# Altium PCB ST-Link.PcbDoc
Units mil, origin at the board's own origin, x right, y up, seen from the top; angles counter-clockwise.
Board outline 1030 x 460 mil, 2 copper layers (Top1, Bottom2), stack 12.8 mil thick; 27 components, 32 nets, 130 pads, 49 vias.
Unrouted connection lines stored in the file: 22.
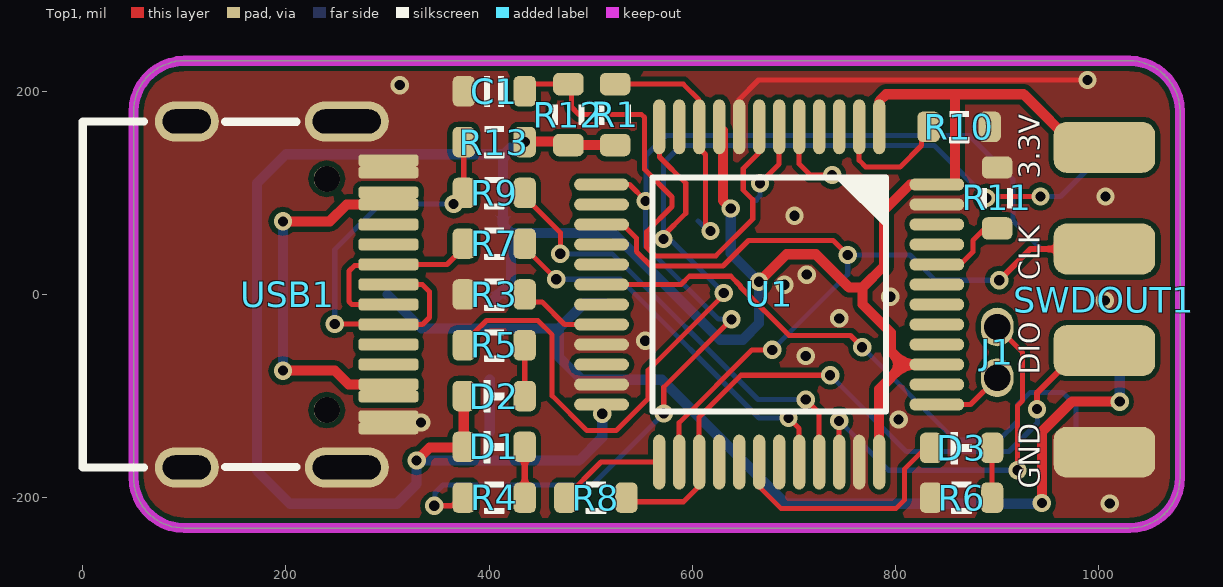
[diagram p0: Top1 view]
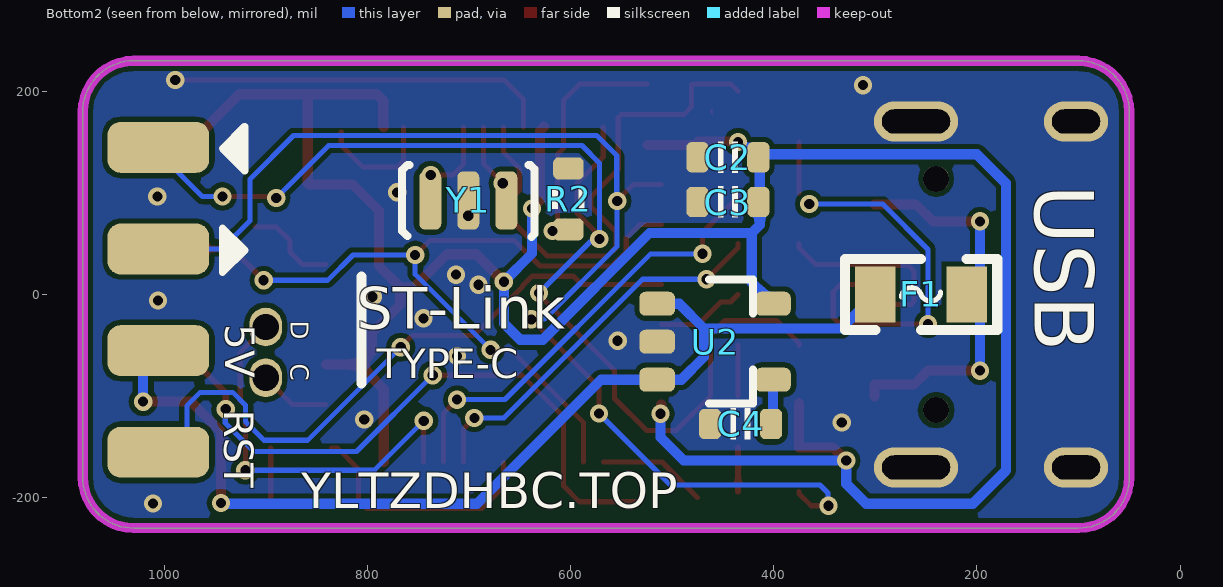
[diagram p1: Bottom2 view, seen from below]
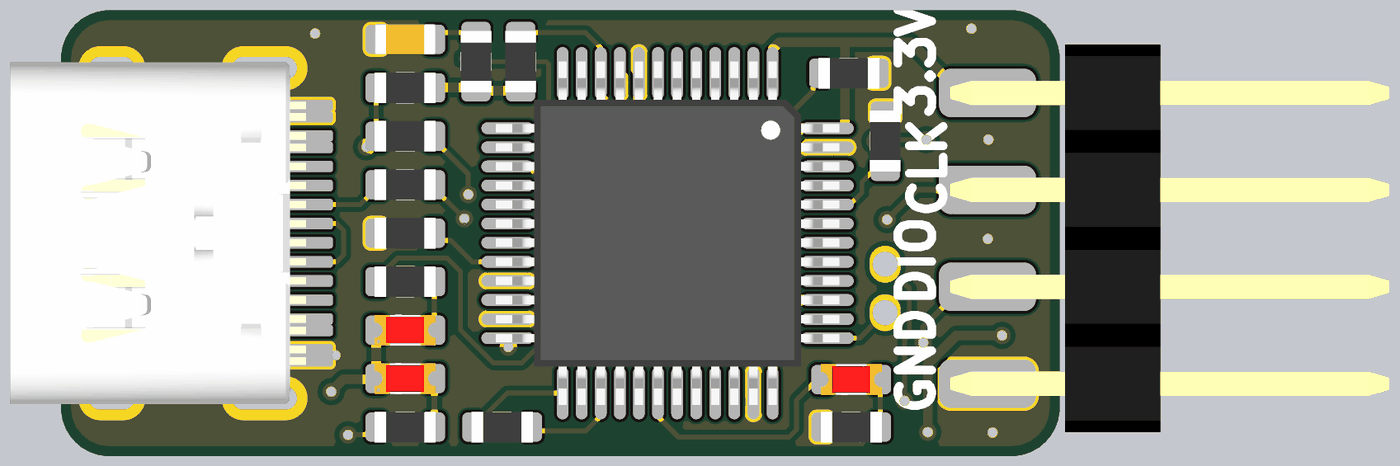
[diagram p2: 3D render of the assembled board from above, using the file's embedded part models]
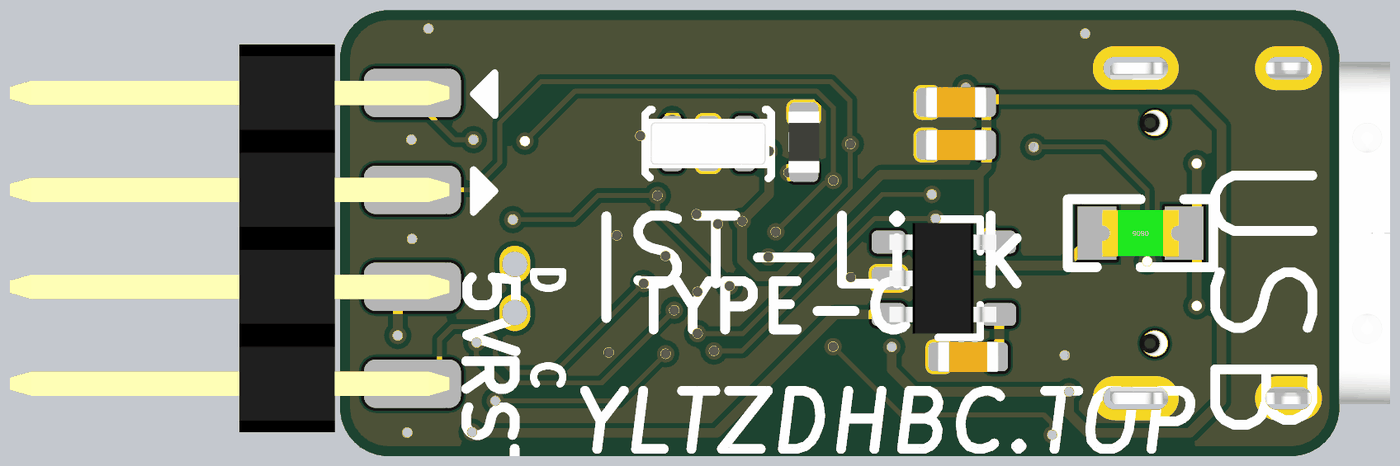
[diagram p3: 3D render of the assembled board from below, using the file's embedded part models]

## Layer stack, top to bottom
Top Solder: solder mask 0.4, Solder Resist, Dk 3.5
Top1: signal copper 1.4
Dielectric 1: core 10, FR-4, Dk 4.2
Bottom2: signal copper 1.4
Bottom Solder: solder mask 0.4, Solder Resist, Dk 3.5

## Board outline
50,-180 50,180 cw(c100,180) 100,230 1030,230 cw(c1030,180) 1080,180 1080,-180 cw(c1030,-180) 1030,-230 100,-230 cw(c100,-180)

## Design rules (kind name [scope] priority, off if disabled: settings)
Clearance [All] p1: gap=5 ignorepadtopadclearanceinfootprint=FALSE
ComponentClearance [All] p1: gap=0 collisioncheckmode=3 verticalgap=0 showdistances=FALSE
DiffPairsRouting [All] p1: maxlimit=9 minlimit=9 mostfreqgap=9 toplayer_minwidth=5 toplayer_maxwidth=100 toplayer_prefwidth=5 bottomlayer_minwidth=5 bottomlayer_maxwidth=100 bottomlayer_prefwidth=5 maxuncoupledlength=500
FanoutControl Fanout_BGA [All] p1: bgadir=Out bgaviamode=Centered fanoutstyle=Auto fanoutdirection=Alternating viagrid=1 // Fanout_BGA (Default Rule)
HoleSize [All] p1: absolutevalues=TRUE maxlimit=10000 minlimit=8 maxpercent=80.000 minpercent=20.000
MinimumSolderMaskSliver [All] p1 off: minsoldermaskwidth=2
PlaneClearance [All] p1: clearance=8
PlaneConnect [All] p1: planeconnectstyle=Direct reliefexpansion=20 reliefentries=4 reliefconductorwidth=10 reliefairgap=10
PolygonConnect [All] p1: connectstyle=Direct reliefconductorwidth=10 reliefentries=4 polygonreliefangle="90 Angle" airgapwidth=10
RoutingVias [All] p1: holewidth=8 width=16 viastyle="Through Hole" minholewidth=6 minwidth=12 maxholewidth=28 maxwidth=50
SilkToBoardRegionClearance [All] p1 off:
SilkToSilkClearance [All] p1: silktosilkclearance=0
SilkToSolderMaskClearance [IsPad] p1: minsilkscreentomaskgap=0 clearancetoexposedcopper=TRUE
SolderMaskExpansion [All] p1: expansion=3 istentingtop=FALSE
Width [All] p1: maxlimit=10000 minlimit=5 preferedwidth=5
20 further rules are at their usual default settings.

## Classes and differential pairs
differential pair USB: +USB_P -USB_N

## Components (designator, comment, footprint, x,y, rotation, side; value= is the part's Value field where it differs from the comment)
C1 "0.1uF" 0603_CAP 405,200 r0 top value=0.1u
C2 "0.1uF" 0603_CAP 445,135 r180 bottom value=0.1u
C3 "10uF" 0603_CAP 445,91 r180 bottom value=0.1u
C4 "10nF" 0603_CAP 432.57,-127.5 r180 bottom value=0.1u
D1 "LED-0603" 0603_LED_RED 405,-150 r0 top
D2 "LED-0603" 0603_LED_RED 405,-100 r0 top
D3 "LED-0603" 0603_LED_RED 865,-151 r0 top
F1 "6V 0.5A" "FU 0805" 254.92,0 r0 bottom
J1 "下载口2P" 下载口2P-1.27 900,-57 r90 top
R1 "10K" 0603_RES 524,177 r90 top
R2 "10K" 0603_RES 602,94 r90 bottom
R3 "10K" 0603_RES 405,0 r180 top
R4 "680R" 0603_RES 405,-200 r0 top
R5 "680R" 0603_RES 405,-50 r0 top
R6 "2K" 0603_RES 865,-200 r0 top
R7 "22R" 0603_RES 405,50 r0 top
R8 "100R" 0603_RES 505,-200 r0 top
R9 "22R" 0603_RES 405,100 r0 top
R10 "10K" 0603_RES 862.57,165 r180 top
R11 "10K" 0603_RES 900,95 r90 top
R12 "10K" 0603_RES 478,177 r270 top
R13 "1K5" 0603_RES 405,150 r0 top
SWDOUT1 "HDR2x4_2.54" HDR2X4_2.54_180H 1005.57,144.72 r0 top
U1 "STM32F103CBT6" LQFP-48 675.57,0 r270 top
U2 "LP2992 3V3" SOT23-5 455.57,-46.5 r180 bottom
USB1 "Type-C" Type-C-TOP 201.57,0 r180 top
Y1 "8MHz" 晶振-3P 700.57,92.5 r0 bottom

## Footprints (in the part's own frame and the unit in brackets; to place one, negate y for a bottom-side part, rotate by r counter-clockwise, add the part's x,y. Pads: shape width x height; smd on the part's side, far side on the other; paste and mask are expansions set on the pad)
0603_CAP [mil]
  rrect50% 22x30 smd: 1(-30,0) 2(30,0)
  silkscreen extent -10,-15 10,15, body extent -31,-16 32,16, height 31
0603_LED_RED [mil]
  rrect50% 22x30 smd: 1(-30,0) 2(30,0)
  silkscreen extent -10,-16 10,16, body extent -31,-16 32,16, height 24
0603_RES [mil]
  rrect50% 22x30 smd: 1(-30,0) 2(30,0)
  silkscreen extent -10,-16 10,16, body extent -31,-16 31,16, height 18
"FU 0805" [mil] "贴片保险丝"
  rect 40x55 smd: 1(-45,0) 2(45,0)
  silkscreen extent -75,-35 75,35, body extent -39,-24 39,24, height 20
HDR2X4_2.54_180H [mil]
  rrect50% 100x50 smd: 1(0,0) 3(0,-100) 5(0,-200) 7(0,-300)
  rrect50% 100x50 smd far side: 2(0,0) 4(0,-100) 6(0,-200) 8(0,-300)
  body extent -38,-350 415,50, height 100
LQFP-48 [mil]
  oval 54x12 smd: 1(-165,108.27) 2(-165,88.58) 3(-165,68.9) 4(-165,49.21) 5(-165,29.53) 6(-165,9.84) 7(-165,-9.84) 8(-165,-29.53) 9(-165,-49.21) 10(-165,-68.9) 11(-165,-88.58) 12(-165,-108.27) 25(165,-108.27) 26(165,-88.58) 27(165,-68.9) 28(165,-49.21) 29(165,-29.53) 30(165,-9.84) 31(165,9.84) 32(165,29.53) 33(165,49.21) 34(165,68.9) 35(165,88.58) 36(165,108.27)
  oval 12x54 smd: 13(-108.27,-165) 14(-88.58,-165) 15(-68.9,-165) 16(-49.21,-165) 17(-29.53,-165) 18(-9.84,-165) 19(9.84,-165) 20(29.53,-165) 21(49.21,-165) 22(68.9,-165) 23(88.58,-165) 24(108.27,-165) 37(108.27,165) 38(88.58,165) 39(68.9,165) 40(49.21,165) 41(29.53,165) 42(9.84,165) 43(-9.84,165) 44(-29.53,165) 45(-49.21,165) 46(-68.9,165) 47(-88.58,165) 48(-108.27,165)
  silkscreen extent -115,-115 115,115, body extent -177,-177 177,177, height 61
SOT23-5 [mm] "SOT23, 3-Leads, Body 3.1x3.0mm (max), Pitch 0.95mm, IPC Medium Density"
  rrect50% 0.889x0.6 smd: 1(-1.5,0.95) 2(-1.5,0) 3(-1.5,-0.95) 4(1.396,-0.95) 5(1.396,0.95)
  silkscreen extent -0.2,-1.55 0.9,1.55, body extent -1.48,-1.45 1.32,1.45, height 1.2
Type-C-TOP [mm]
  round 0.65 hole 0.65: 0(-0.98,2.89) 0(-0.98,-2.89)
  oval 1.6x1 hole 0.6 slot 1.2 at 0 deg: 1(2.52,4.325) 2(2.52,-4.325)
  oval 2.1x1 hole 0.6 slot 1.7 at 0 deg: 3(-1.48,-4.325) 4(-1.48,4.325)
  rrect50% 1.5x0.3 smd: A1(-2.52,-3.35) A4(-2.52,-2.55) A5(-2.52,-1.25) A6(-2.52,-0.25) A7(-2.52,0.25) A8(-2.52,1.25) A9(-2.52,2.55) A12(-2.52,3.35) B1(-2.52,3.05) B4(-2.52,2.25) B5(-2.52,1.75) B6(-2.52,0.75) B7(-2.52,-0.75) B8(-2.52,-1.75) B9(-2.52,-2.25) B12(-2.52,-3.05)
  silkscreen extent -0.22,-4.33 5.12,4.33, body extent -2.57,-4.48 5.18,4.48, height 3.26
下载口2P-1.27 [mil]
  oval 38x32 hole 26 mask+0: 1(-25,0) 2(25,0)
晶振-3P [mm] "贴片晶振"
  rrect50% 0.55x1.45 smd: 1(-0.95,0) 2(0,0) 3(0.95,0)
  silkscreen extent -1.65,-0.89 1.65,0.91, body extent -1.6,-0.89 1.65,0.89, height 0.7

## Part data
C1 C2 C3 C4: library part 电容-0603, "电容"
D1 D2 D3: library part 二极管-0603-RED, "发光二极管"
F1: library part FU, "贴片保险丝", BOM名称=贴片保险丝, 学习资源=https://shop463601444.taobao.com, 版权归属="封装库来自淘宝卖家 ID：黄晶宝石"
J1: library part 接插件-下载口2P, "下载口2P SWD"
R1 R2 R3 R4 R5 R6 R7 R8 R9 R10 R11 R12 R13: library part 电阻-0603, "电阻"
SWDOUT1: "Header"
U1: "ARM Cortex-M3 32-bit MCU, 128 KB Flash, 20 KB Internal RAM, 37 I/Os, 48-pin LQFP, -40 to 85 degC, Tray", I/Os (High Current)=37, Operating Frequency(F) (Processor speed) (MHz)=72, Supplier Part Number 1=497-6288-ND, Supply Voltage(Vcc) min (V)=2, A/D Converter="2x12-bit (10 Channel)", ComponentLink1Description="Manufacturer URL", ComponentLink1URL=http://www.st.com/web/en/home.html, ComponentLink2Description=Datasheet, ComponentLink2URL=http://www.st.com/st-web-ui/static/active/en/resource/technical/document/datasheet/CD00161566.pdf, ComponentLink3Description="Package Specification", ComponentLink3URL=http://www.st.com/st-web-ui/static/active/en/resource/technical/document/datasheet/DM00058181.pdf, Core="ARM Cortex-M3", DatasheetVersion="Rev. 16", FLASH Size (Prog) (kB)=128, Internal RAM Size (kB)=20, Mounting Technology="Surface Mount", PackageDescription="48-Pin Low Profile Quad Flat Package, 7 x 7 mm Body, 0.5 mm Pitch", PackageReference=LQFP48, PackageVersion="Rev. 6, 06/2013", Packing=Tray, PartNumber=STM32F103CBT6, Supplier 1=Digi-Key, Supplier 2=Farnell, Supplier 3=Newark, Supplier 4=Newark, Supplier 5=Mouser, Supplier Part Number 2=1606327, Supplier Part Number 3=11N8296, Supplier Part Number 4=57P1214, Supplier Part Number 5=511-STM32F103CBT6
U2: library part LP2992, "LDO"
USB1: library part USB-Type-C-TOP
Y1: library part 晶振-3Pin, "村田贴片"

## Via types
v1: diameter 18, hole 10, Top1 to Bottom2, tented both sides, 49 vias

## Nets (pads, with @x,y where several pads share a name; then routed paths per layer and width w, separated by ;. In a path a pad name is that pad's centre, name@x,y a point inside that pad or via, vN(x,y) a via of type N, cw(c..) or ccw(c..) an arc to the next point about the centre after c; other vN are vias at no path point)
3V3: C2.2 C3.2 D1.1 D2.1 R1.1 R12.2 R13.2 SWDOUT1.1 U1.1 U1.9 U1.24 U1.36 U1.39 U1.48 U2.5 | length 2718.4
  Top1 w10: v1(328.57,-163.5) 341.5,-150.57 375,-150.57 D1.1 D2.1@375,-107.14 ; v1(435,150) 435.5,150.5 474.5,150.5 R12.2 R1.1 ; U1.24 510.57,-116.62 v1(511.37,-117.41) ; U1.9 630.05,161.32 630.05,92.43 v1(637.83,84.65) ; v1(665.57,12.5) 692.57,39.5 721.57,39.5 754.06,7.02 767.57,7.02 ; U1.36 783.84,-93.23 808.18,-68.9 ; U1.1 784.23,165.38 784.23,190.52 790.7,197 858.6,197 926,197 978.28,144.72 SWDOUT1.1 ; U1.39 808.18,-68.9 ; 858.6,196.5 858.6,109.19 857.68,108.27 814.14,108.27 788.57,82.71 788.57,28.02 767.57,7.02 ; 767.57,7.02 767.57,-9.86 795.21,-37.5 795.21,-55.93 808.18,-68.9
  Bottom2 w10: U2.5 421.58,11.85 421.58,60.5 ; C2.2@413.65,131.07 413.65,91 413.65,68.43 421.58,60.5 ; v1(435,150) 432.84,150 427.53,144.69 420.96,144.69 415,138.73 C2.2 412,138 200,138 171.43,109.43 171.43,-173.43 204,-206 309,-206 328.57,-186.43 v1(328.57,-163.5) 488.5,-163.5 511.37,-140.63 v1(511.37,-117.41) ; v1(637.83,84.65) 637.83,40.25 v1(665.57,12.5) 665.57,-28.5 649.57,-44.5 627.18,-44.5 522.18,60.5 421.58,60.5
5V: F1.2 SWDOUT1.6 U2.1 U2.3 | length 1016.2
  Top1 w10: v1@944,-206 944,-135.03 973.53,-105.5 v1(1020.57,-105.5)
  Bottom2 w10: F1.2 333.39,-33.46 372.61,-33.46 ; 372.57,-33.5 468.57,-33.5 ; U2.1 492.98,-9.1 468.57,-33.5 ; v1@944,-206 691.99,-206 569.89,-83.9 U2.3 490.98,-83.9 468.57,-61.5 468.57,-33.5 ; SWDOUT1.6@1010.57,-55.28 1020.57,-65.28 v1(1020.57,-105.5)
  other v1: 944,-205.28
5V_IN: F1.1 USB1.A4 USB1.A9 USB1.B4 USB1.B9 | length 378.8
  Top1 w10: v1(197,-75) 248.23,-75 261.81,-88.58 USB1.B4 USB1.A9 ; v1(197,71.93) 243.19,71.93 259.84,88.58 USB1.B9
  Bottom2 w10: v1(197,-75) v1(197,71.93)
GND: C1.1 C2.1 C3.1 C4.1 R2.2 R3.2 R6.1 R10.1 R11.2 SWDOUT1.7 U1.8 U1.21 U1.23 U1.35 U1.47 U2.2 USB1.1 USB1.2 USB1.3 USB1.4 USB1.A1 USB1.A12 USB1.B1 USB1.B12 Y1.2 | length 377.8
  Top1 w5: U1.8 646.05,191.97 665.07,211 v1(989,211)
  other v1: 1010.83,-205.71 333,-126 803,-123 711.57,-60.5 553.57,-45.5 744.57,-23.5 1005.91,-5.91 794.72,-2.2 690.57,9.5 712.57,19.5 700.57,77.5 1006.57,96.5 770.57,100.5 312,206
JTCK: SWDOUT1.3 U1.15 U1.26 | length 848.3
  Top1 w5: U1.15 531.57,68.9 545.07,55.4 545.07,42.16 559.23,28 630.07,28 655.22,53.15 738.6,53.15 v1(752.89,38.86) ; U1.26 586.99,-126.23 658.72,-54.5 v1(678.57,-54.5)
  Top1 w6: v1(902,14) 932.72,44.72 SWDOUT1.3 SWDOUT1.3@1010.57,44.72
  Bottom2 w5: v1(678.57,-54.5) 752.89,19.82 v1(752.89,38.86) 814.14,38.86 839,14 v1(902,14)
JTDI: U1.17
JTDO: U1.16
JTMS: R8.2 SWDOUT1.5 U1.27 | length 652.3
  Top1 w5: R8.2@535,-204 591.26,-204 606.68,-188.58 U1.27 606.68,-120.68 647.86,-79.5 v1(735.57,-79.5)
  Top1 w6: v1(939.29,-112.87) 939.29,-96.56 980.57,-55.28 SWDOUT1.5
  Bottom2 w5: v1(735.57,-79.5) 810.57,-154.5 911.7,-154.5 939.79,-126.41 939.79,-113.37 v1(939.29,-112.87)
LED_RUN: D3.1 U1.30 | length 244.8
  Top1 w5: U1.30 665.73,-189.16 687.07,-210.5 800.57,-210.5 808.57,-202.5 808.57,-172 829.57,-151 D3.1
NetC1_2: C1.2 R12.1 U1.7 | length 518.5
  Top1 w5: C1.2 442,207 R12.1 ; R12.1@479.93,207.17 481,206.11 481,184.5 488.5,177 550.07,177 553,174.07 553,122.98 580,95.98 580,86.63 555.07,61.7 555.07,46.3 563.37,38 623.07,38 659.45,74.37 659.45,93.29 650.07,102.67 650.07,124 665.73,139.66 U1.7
NetC4_2: C4.2 U2.4 | length 51.6
  Bottom2 w10: C4.2@400.63,-135.5 U2.4
NetD1_2: D1.2 R4.2 | length 43.4
  Top1 w6: R4.2@435,-194 D1.2@435,-150.57
NetD2_2: D2.2 R5.2 | length 50
  Top1 w5: D2.2 R5.2
NetD3_2: D3.2 R6.2 | length 49
  Top1 w5: R6.2 D3.2
NetR1_2: R1.2 R2.1 U1.10 | length 238.9
  Top1 w5: R1.2 591,207 606.68,191.32 606.68,143.98 612.86,137.8 612.86,67.39 v1(617.75,62.5)
  Bottom2 w5: R2.1@605.57,72.5 615.57,62.5 v1(617.75,62.5)
NetR3_1: R3.1 U1.20 | length 87.8
  Top1 w5: R3.1 442.5,-7.5 452.12,-7.5 474.15,-29.53 U1.20
NetR7_2: R7.2 U1.32 | length 380.8
  Top1 w5: R7.2 435,46 v1(466,15) ; v1(694.57,-121.5) 705.1,-132.03 U1.32
  Bottom2 w5: v1(466,15) 529.07,15 665.57,-121.5 v1(694.57,-121.5)
NetR8_1: R8.1 U1.25 | length 106.8
  Top1 w5: R8.1 510,-165 U1.25
NetR9_2: R9.2 U1.33 | length 442.5
  Top1 w5: R9.2 435,96 470,61 v1(470,40) ; v1(711.57,-103.5) 724.79,-116.71 U1.33
  Bottom2 w5: v1(470,40) 521.03,40 664.52,-103.5 v1(711.57,-103.5)
NetR10_2: R10.2 U1.2 | length 119.3
  Top1 w5: U1.2 764.16,131.97 770.6,125.52 804.52,125.52 825.57,146.57 R10.2@825.57,160
NetR11_1: R11.1 U1.44 | length 91.3
  Top1 w5: U1.44 863.64,29.53 876,41.89 876,53 889.5,66.5 R11.1@910,66.5
NetU1_5: U1.5 Y1.3 | length 73.7
  Top1 w5: U1.5 705.1,128.29 715.89,117.5 v1(737.57,117.5)
NetU1_6: U1.6 Y1.1 | length 82.2
  Top1 w5: v1(666.57,109.5) 685.42,128.34 U1.6
  Bottom2 w5: Y1.1 662.57,93.1 666.57,97.1 v1(666.57,109.5)
nRST: SWDOUT1.8 U1.18 | length 637.9
  Top1 w5: U1.18 588.92,9.84 596.97,17.89 637.74,17.89 647.41,8.23 647.41,7.34 695.24,-40.5 755.67,-40.5 v1(767.09,-51.92)
  Bottom2 w5: v1(767.09,-51.92) 858.67,-143.5 901.57,-143.5 920,-125.07 920,-108.83 932.46,-96.37 964.4,-96.37 977.62,-109.59 977.62,-133.07 999.82,-155.28 SWDOUT1.8@1010.57,-155.28
RENUMn: U1.38
RX: R4.1 SWDOUT1.4 U1.13 | length 1210.6
  Top1 w5: v1(346,-208) 363.11,-208 375,-196.11 R4.1@375,-194 ; U1.13 538.18,108.27 554.15,92.3 554.15,92.15 v1(554,91.99) ; v1(571.85,-117.13) 571.85,-91.22 v1(638.57,-24.5)
  Bottom2 w5: v1(346,-208) 346.61,-207.39 346.61,-195.39 354.5,-187.5 501.48,-187.5 v1(571.85,-117.13) ; v1(554,91.99) 554,47.37 625.56,-24.18 638.26,-24.18 v1(638.57,-24.5) ; v1@554.45,91.99 554.45,136.71 574.25,156.5 872.5,156.5 915.5,113.5 915.5,72.57 943.35,44.72 SWDOUT1.4
ST_SWCLK: J1.1 U1.37 | length 70.3
  Top1 w5: U1.37 873.73,-108.27 J1.1
ST_SWDIO: J1.2 U1.34 | length 389.7
  Top1 w5: U1.34 v1(744.47,-124.4) ; J1.2 925,-57 925,-104.53 920,-109.53 v1(920,-173)
  Bottom2 w5: v1(744.47,-124.4) 793.07,-173 v1(920,-173)
T_SWO: U1.31
TX: R5.1 SWDOUT1.2 U1.12 | length 1197.5
  Top1 w5: R5.1 375,-47.89 385.58,-37.32 397.3,-25.59 447.86,-25.59 462,-39.73 462,-99.78 496.13,-133.91 525.02,-133.91 556.57,-102.36 556.57,-74.5 630.91,-0.17 v1(630.91,1.39) ; U1.12 567.7,164.61 567.7,135.3 593.5,109.5 593.5,79.93 571.57,58 v1(571.57,54.5) ; v1(889.5,95) 891,96.5 v1(942.57,96.5)
  Bottom2 w5: v1@570,56.07 574.06,52.01 580.28,52.01 v1(630.91,1.39) ; v1(571.57,54.5) 571.57,129.37 588.7,146.5 838,146.5 v1(889.5,95) ; v1(942.57,96.5) 962.35,96.5 SWDOUT1.2@1010.57,144.72
USB_N: R7.1 USB1.A7 USB1.B7 | length 196.5
  Top1 w5: USB1.A7 264.84,-9.84 262,-7 262,23 267.6,28.6 299.86,28.6 USB1.B7 358.53,29.53 375,46 R7.1
USB_P: R9.1 R13.1 USB1.A6 USB1.B6 | length 420.7
  Top1 w5: v1(248,-29) 296.26,-29 USB1.B6@297.26,-30 ; USB1.B6 334.47,-29.53 341.34,-22.66 341.34,2.66 334.16,9.84 USB1.A6 ; R9.1 R13.1
  Bottom2 w5: v1(248,-29) 248,44.26 292.74,89 v1(365,89)
pads on no net: U1.3 U1.4 U1.11 U1.14 U1.19 U1.22 U1.28 U1.29 U1.40 U1.41 U1.42 U1.43 U1.45 U1.46 USB1.0 USB1.A5 USB1.A8 USB1.B5 USB1.B8

## Polygon pours and split planes (outlines as drawn)
GND on Bottom2 "GND_L02_P000" (solid, remove dead copper, pour order 0): 49.21,230.32 1080.71,230.32 1080.71,-230.31 49.21,-230.31
GND on Top1 "GND_L01_P001" (solid, remove dead copper, pour order 1): 49.21,230.32 1080.71,230.32 1080.71,-230.31 49.21,-230.31

## Keep-outs
Keep-Out Layer:
  the board outline again, w10

## Silkscreen, mask and mechanical layers (free items; w line width, h text height)
Top Overlay:
  text "3.3V" at 948.57,113.91 h35 r90
  text "CLK" at 949,13.91 h35 r90
  text "DIO" at 948.57,-79.09 h35 r90
  text "GND" at 948.57,-191.09 h35 r90
Bottom Overlay:
  region: 920.57,165.5 920.57,121.5 942.57,143.5
  region: 942.57,21.5 942.57,65.5 920.57,43.5
  lines w7: 920.57,43.5 942.57,21.5 942.57,65.5 920.57,43.5 ; 920.57,121.5 942.57,143.5 920.57,165.5 920.57,121.5
  lines w10: 805.57,-87.5 805.57,17.5
  text "USB" at 162,108 h100 r90
  text "D   C" at 881,-26 h30 r90
  text "5V" at 949.57,-29.5 h50 r90
  text "ST-Link" at 810.57,-47.5 h70
  text "TYPE-C" at 790.57,-92.5 h50
  text "RST" at 950.57,-113.5 h50 r90
  text "YLTZDHBC.TOP" at 865,-222 h60